# EAGLE board avr-grundschaltung-selber-machen (EAGLE 4.16)
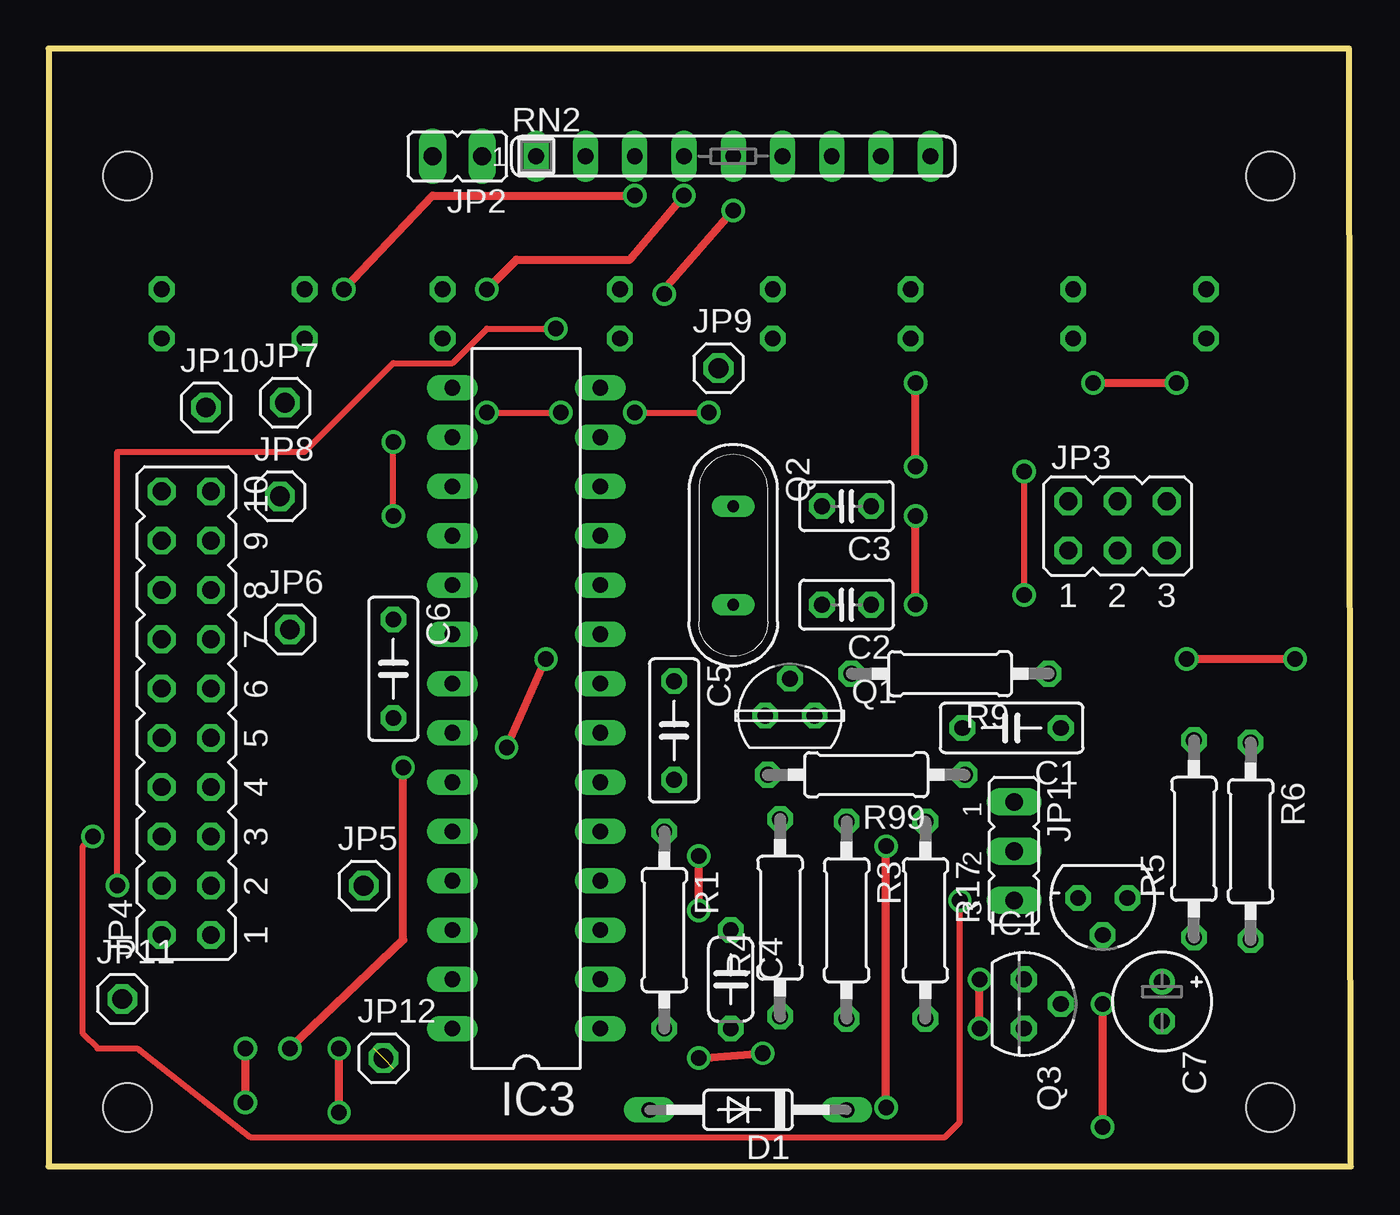
[diagram p0: board, top side]
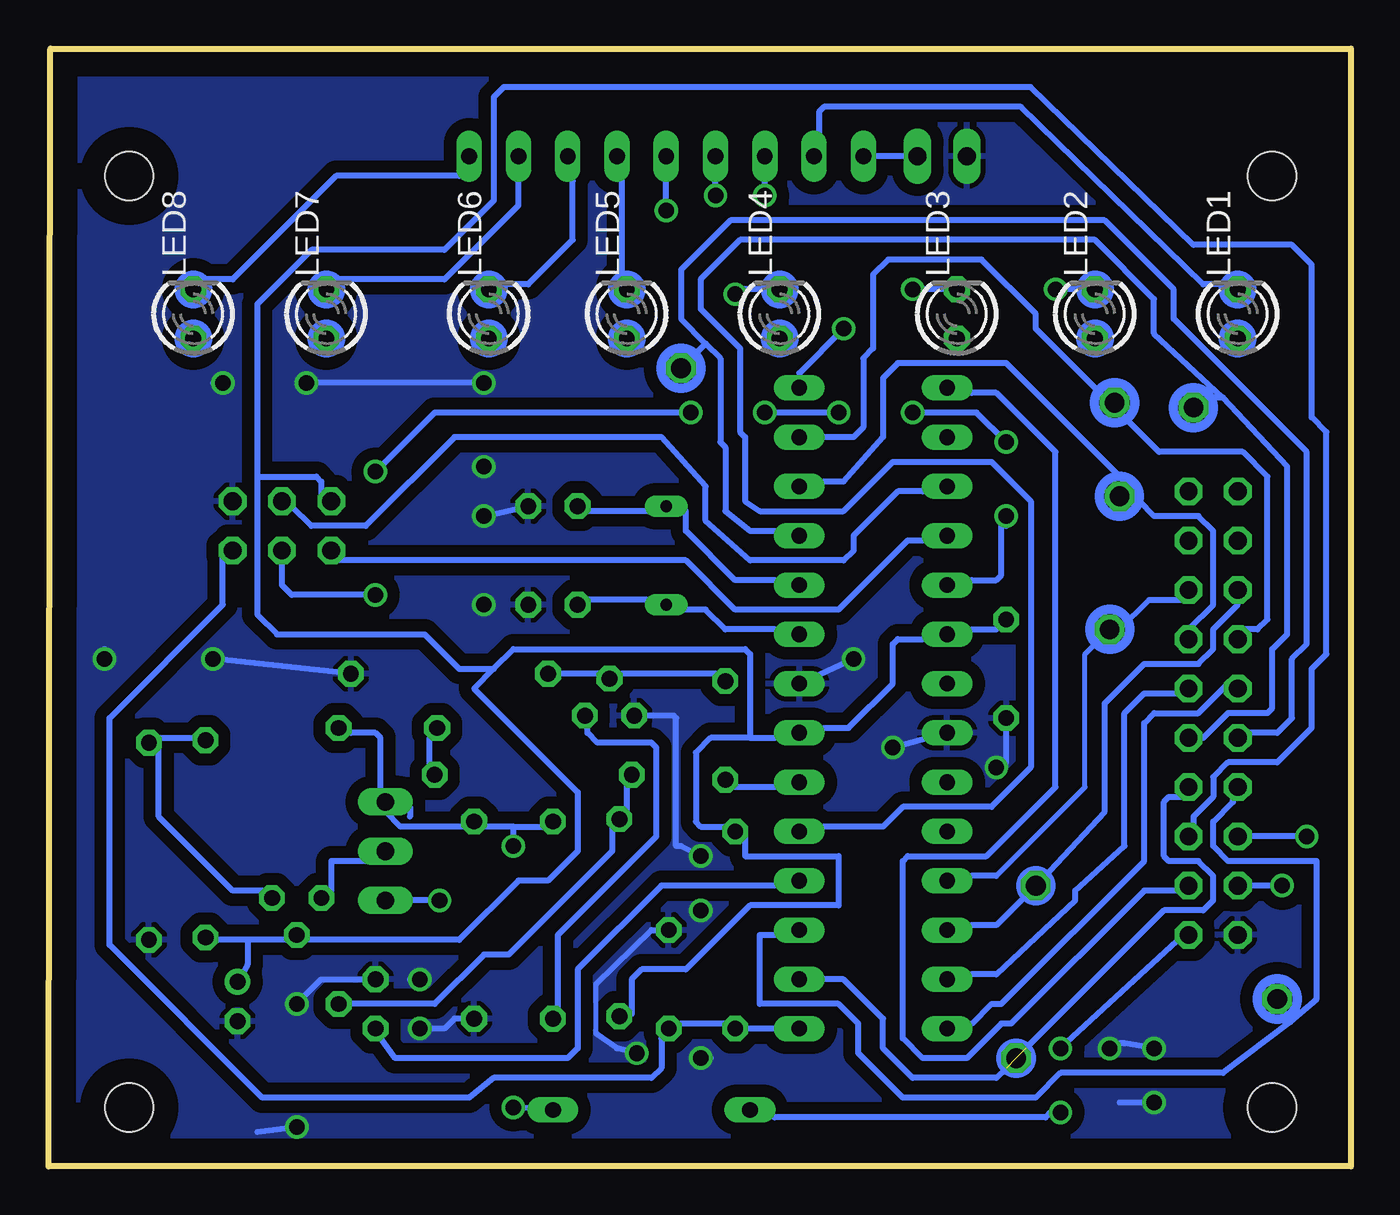
[diagram p1: board, bottom side, seen from below]

Size 67.15 x 57.61 mm. Coordinates in mm from the lower left corner, seen from the top.
Outline: 0,57.61 0,0 67.15,0 67.05,57.61 0,57.61
Copper layers (1*16): Top 0.035mm / dielectric 1.5mm / Bottom 0.035mm
Design rules "default": minimum track width 10mil, minimum drill 24mil, track to track 25mil, track to pad 15mil, pad to pad 8mil, via to via 50mil, smd to smd 8mil, copper to edge 50mil, drill to drill 50mil, minimum pad ring 10mil, minimum via ring 8mil, stop-mask expansion 4mil, vias tented up to drill 0mil, thermal gap 10mil
Holes 2.5 mm at 4.06,3.04 4.06,51.04 62.99,3.04 62.99,51.04

## Footprints (pad centres in the part's own frame; a part is rotated, then mirrored left to right if it is on the bottom)
C050-025X075 = drill 0.813 octagon: 1 -2.54,0; 2 2.54,0
C025-025X050 = drill 0.813 octagon: 1 -1.27,0; 2 1.27,0
C050-024X044 = drill 0.813 octagon: 1 -2.54,0; 2 2.54,0
E2-5 = drill 0.813 pad 1.27 round: + -1.016,0 | drill 0.813 pad 1.27 octagon: - 1.016,0
DO35-10 = drill 0.813 long: A 5.08,0; C -5.08,0
317L = drill 0.813 octagon: 1 -1.27,0; 2 0,1.905; 3 1.27,0
DIL28-3 = drill 0.813 long: 1 -16.51,-3.81; 2 -13.97,-3.81; 3 -11.43,-3.81; 4 -8.89,-3.81; 5 -6.35,-3.81; 6 -3.81,-3.81; 7 -1.27,-3.81; 8 1.27,-3.81; 9 3.81,-3.81; 10 6.35,-3.81; 11 8.89,-3.81; 12 11.43,-3.81; 13 13.97,-3.81; 14 16.51,-3.81; 15 16.51,3.81; 16 13.97,3.81; 17 11.43,3.81; 18 8.89,3.81; 19 6.35,3.81; 20 3.81,3.81; 21 1.27,3.81; 22 -1.27,3.81; 23 -3.81,3.81; 24 -6.35,3.81; 25 -8.89,3.81; 26 -11.43,3.81; 27 -13.97,3.81; 28 -16.51,3.81
JP2 = drill 0.914 long: 1 -2.54,0; 2 0,0; 3 2.54,0
JP1 = drill 0.914 long: 1 0,-1.27; 2 0,1.27
JP3Q = drill 0.914 octagon: 1 -2.54,-1.27; 2 -2.54,1.27; 3 0,-1.27; 4 0,1.27; 5 2.54,-1.27; 6 2.54,1.27
JP10Q = drill 0.914 octagon: 1 -11.43,-1.27; 2 -11.43,1.27; 3 -8.89,-1.27; 4 -8.89,1.27; 5 -6.35,-1.27; 6 -6.35,1.27; 7 -3.81,-1.27; 8 -3.81,1.27; 9 -1.27,-1.27; 10 -1.27,1.27; 11 1.27,-1.27; 12 1.27,1.27; 13 3.81,-1.27; 14 3.81,1.27; 15 6.35,-1.27; 16 6.35,1.27; 17 8.89,-1.27; 18 8.89,1.27; 19 11.43,-1.27; 20 11.43,1.27
1X01 = drill 1.016 octagon: 1 0,0
LED3MM = drill 0.813 octagon: A -1.27,0; K 1.27,0
TO237 = drill 0.813 octagon: 1 1.27,0; 2 0,1.905; 3 -1.27,0
QS = drill 0.61 long: 1 -2.54,0; 2 2.54,0
TO92 = drill 0.813 octagon: 1 1.27,0; 2 0,1.905; 3 -1.27,0
0207/10 = drill 0.813 octagon: 1 -5.08,0; 2 5.08,0
SIL9 = drill 0.813 long: 1 -10.16,0; 2 -7.62,0; 3 -5.08,0; 4 -2.54,0; 5 0,0; 6 2.54,0; 7 5.08,0; 8 7.62,0; 9 10.16,0

## Placement (x,y rotation side)
C1  100n  [C050-025X075]  49.65,22.59 180 top
C2  33p  [C025-025X050]  41.14,28.94 180 top
C3  33p  [C025-025X050]  41.14,34.02 180 top
C4  47n  [C050-024X044]  35.17,9.64 270 top
C5  100n  [C050-025X075]  32.25,22.47 270 top
C6  100n  [C050-025X075]  17.78,25.64 270 top
C7  1u  [E2-5]  57.4,8.5 270 top
D1  1N4148  [DO35-10]  36.06,2.91 180 top
IC1  [317L]  54.35,13.83 180 top
IC3  MEGA8-P  [DIL28-3]  24.63,23.61 90 top
JP1  [JP2]  49.78,16.24 270 top
JP2  [JP1]  21.08,52.06 90 top
JP3  [JP3Q]  55.11,33.01 0 top
JP4  [JP10Q]  7.11,23.36 90 top
JP5  [1X01]  16.25,14.47 0 top
JP6  [1X01]  12.44,27.67 0 top
JP7  [1X01]  12.19,39.36 0 top
JP8  [1X01]  11.93,34.53 0 top
JP9  [1X01]  34.54,41.14 0 top
JP10  [1X01]  8.12,39.1 0 top
JP11  [1X01]  3.81,8.62 0 top
JP12  [1X01]  17.27,5.58 0 top
LED1  [LED3MM]  5.84,43.93 90 bottom
LED2  [LED3MM]  13.2,43.93 90 bottom
LED3  [LED3MM]  20.32,43.93 90 bottom
LED4  [LED3MM]  29.46,43.93 90 bottom
LED5  [LED3MM]  37.33,43.93 90 bottom
LED6  [LED3MM]  44.45,43.93 90 bottom
LED7  [LED3MM]  52.83,43.93 90 bottom
LED8  [LED3MM]  59.68,43.93 90 bottom
Q1  2N7000  [TO237]  38.22,23.23 0 top
Q2  8,000  [QS]  35.3,31.48 270 top
Q3  BC557  [TO92]  50.29,8.37 270 top
R1  10k  [0207/10]  31.75,12.18 270 top
R3  68R  [0207/10]  41.14,12.69 270 top
R4  47k  [0207/10]  37.71,12.81 90 top
R5  330R  [0207/10]  59.05,16.88 90 top
R6  550R  [0207/10]  61.97,16.75 270 top
R9  470k  [0207/10]  46.48,25.39 180 top
R17  100k  [0207/10]  45.21,12.69 270 top
R99  10k  [0207/10]  42.16,20.18 180 top
RN2  470R  [SIL9]  35.3,52.06 0 top

## Library data of the parts
C1-C7 R1 R3-R6 R9 R17 R99 = rcl
D1 = diode
IC1 = v-reg
IC3 = atmel
JP1-JP4 = jumper
JP5-JP12 = pinhead
LED1-LED8 = led
Q1 = transistor-fet
Q2 = special
Q3 = transistor-pnp
RN2 = resistor-sil

## Nets
EIB+: D1.A JP4.1
EIB_IN: IC3.4 Q3.1
EIB_OUT: C5.2 IC3.6
GND [supply]: C2.1 C3.1 C4.1 C6.2 C7.- IC3.8 IC3.22 JP2.2 JP3.6 JP4.2 Q1.3 Q3.3 R6.2 R9.1 R17.2
MISO: IC3.18 JP3.1
MOSI: IC3.17 JP3.4
N$1 [supply]: C1.2 R99.1
N$2: IC1.1 R5.2 R6.1
N$3 [supply]: C1.1 D1.C JP1.1 R3.1 R17.1
N$4: LED8.K RN2.9
N$5 [supply]: Q1.1 R3.2
N$6 [supply]: IC1.3 JP1.2
N$7 [supply]: Q3.2 R4.2 R99.2
N$8: C2.2 IC3.9 Q2.2
N$9: C3.2 IC3.10 Q2.1
N$10: LED7.K RN2.8
N$11: LED6.K RN2.7
N$12: C5.1 Q1.2 R9.2
N$13: LED5.K RN2.6
N$14: LED4.K RN2.5
N$15: LED3.K RN2.4
N$16: LED2.K RN2.3
N$17: LED1.K RN2.2
N$18: JP2.1 RN2.1
OC1A/PWM1: IC3.15 JP4.3
PB0: IC3.14 JP4.4
PC0/ADC0: IC3.23
PC1/ADC1: IC3.24
PC2/ADC2: IC3.25 JP4.15 JP6.1
PC3/ADC3: IC3.26 JP4.16 JP5.1
PC4/ADC4/SDA: IC3.27 JP4.11
PC5/ADC5/SCL: IC3.28 JP4.12
PD0/RXD: IC3.2 JP4.7 JP12.1
PD1/TXD: IC3.3 JP4.8 JP11.1
PD3/INT1: IC3.5 JP4.9 JP10.1
PD5/T1: IC3.11 JP4.10 JP9.1
PD6/AIN0: IC3.12 JP4.13 JP8.1
PD7/AIN1: IC3.13 JP4.14 JP7.1
RESET: C4.2 IC3.1 JP3.5 R1.2
SCK: IC3.19 JP3.3
VCC: C6.1 C7.+ IC1.2 IC3.7 IC3.20 JP3.2 JP4.5 R1.1 R4.1 R5.1
VEXT [supply]: JP1.3 JP4.6

## Tracks (layer width: path | path; a pad name or v marks a point on that pad's centre or on a via)
EIB+  (via drill 0.8)
  Top 0.406: v14.98,2.78 v14.98,6.08
  Bottom 0.305: v14.98,6.08 8.63,11.93 JP4.1 | v14.98,2.78 15.49,2.78 15.74,2.53 29.71,2.53 D1.A
EIB_IN
  Bottom 0.305: IC3.4 29.71,14.47 35.55,14.47 39.87,10.15 39.87,6.08 40.38,5.58 49.27,5.58 50.03,6.59 Q3.1
EIB_OUT
  Bottom 0.305: IC3.6 29.71,19.55 31.75,19.55 C5.2
GND  (via drill 0.8)
  Top 0.406: v58.67,26.15 v64.26,26.15 | v23.62,21.58 v25.65,26.15 | v18.28,20.56 18.28,11.67 v12.44,6.08 | v48,7.1 v48,9.64 | v54.35,2.02 v54.35,8.37 | v44.7,28.94 v44.7,33.52 | v44.7,36.06 v44.7,40.37 | v53.84,40.37 v58.16,40.37 | v10.15,3.29 v10.15,6.08 | v33.52,5.58 v36.82,5.83 | v33.52,13.2 v33.52,15.99
  Bottom 0.254: 38.91,6.85 38.91,9.39
  Bottom 0.305: R9.1 v58.67,26.15 | v64.26,26.15 64.26,26.66 | IC3.22 v23.62,21.58 | v25.65,26.15 IC3.8 | C6.2 17.78,20.82 v18.28,20.56 | R17.2 46.22,7.61 46.73,7.1 v48,7.1 | v48,9.64 48.51,9.64 | Q3.3 53.08,9.64 v54.35,8.37 | v54.35,2.02 56.38,1.77 | v44.7,33.52 C3.1 | v44.7,36.06 44.7,36.31 | v44.7,40.37 v53.84,40.37 | v58.16,40.37 58.67,40.37 | 11.93,6.34 11.68,6.34 v10.15,6.08 | v10.15,3.29 11.93,3.29 | C4.1 36.06,12.18 38.91,9.39 | 38.91,6.85 37.84,6.08 v36.82,5.83 | v33.52,5.58 33.02,5.58 | Q1.3 34.92,23.23 34.79,23.1 34.79,16.5 34.54,16.5 v33.52,15.99 | v33.52,13.2 33.27,12.94
  pour Bottom: 0.25,57.14 66.8,57.14 66.8,0.24 0.25,0.24
MISO
  Bottom 0.305: IC3.18 22.09,32.25 22.86,32.25 26.41,28.69 31.75,28.69 34.28,31.23 52.32,31.23 JP3.1
MOSI
  Bottom 0.305: IC3.17 22.09,34.79 23.36,34.79 25.65,32.5 25.65,31.74 26.16,31.23 30.98,31.23 33.27,33.26 33.27,35.04 35.55,37.58 46.22,37.58 50.79,33.01 53.59,33.01 54.6,34.02 JP3.4
N$1
  Bottom 0.305: R99.1 47.49,20.82 47.49,22.09 C1.2
N$2
  Bottom 0.305: 61.46,22.09 61.46,18.02 57.65,14.21 56.13,14.21 IC1.1 | 61.46,22.09 59.68,22.09 R5.2 | 61.46,22.09 R6.1
N$3  (via drill 0.8)
  Top 0.406: v43.17,3.04 v43.17,16.5
  Bottom 0.305: C1.1 51.56,22.34 50.29,22.34 50.03,22.09 50.03,19.29 JP1.1 | R17.1 44.7,18.02 | 48.51,18.02 48.51,18.53 JP1.1 | R17.1 45.71,18.02 | D1.C v43.17,3.04 | 43.17,17.51 41.65,17.51 R3.1 | v43.17,16.5 43.17,17.51 | 43.17,17.51 44.7,17.51 R17.1 | R17.1 45.71,17.51 49.02,17.51 49.78,18.28 JP1.1
N$4
  Bottom 0.305: RN2.9 45.97,51.04 52.32,51.04 57.65,45.71 59.43,45.71 LED8.K
N$5
  Bottom 0.305: R3.2 40.89,8.12 40.89,11.93 35.81,17.01 35.81,21.58 36.06,21.83 38.86,21.83 39.36,22.34 39.36,22.59 Q1.1
N$6
  Bottom 0.305: IC1.3 52.57,14.21 52.57,15.74 50.79,15.74 JP1.2
N$7
  Bottom 0.305: R99.2 37.33,19.55 37.33,18.28 R4.2 38.09,17.51 38.09,16.24 43.43,10.91 44.7,10.91 47.24,8.37 Q3.2
N$8
  Bottom 0.305: C2.2 39.36,29.2 36.32,29.2 Q2.2 34.28,28.69 33.27,28.69 32.25,27.67 29.71,27.67 IC3.9
N$9
  Bottom 0.305: C3.2 39.36,33.77 36.32,33.77 Q2.1 34.28,33.77 34.28,32.75 31.75,30.21 29.71,30.21 IC3.10
N$10
  Bottom 0.305: RN2.8 42.92,49.52 46.73,45.71 52.57,45.71 LED7.K
N$11
  Bottom 0.305: LED6.K 43.94,45.45 42.41,45.45 40.13,47.74 40.13,50.79 RN2.7
N$12
  Bottom 0.305: C5.1 32.76,25.39 37.59,25.39 Q1.2 38.6,25.39 R9.2
N$13
  Bottom 0.305: LED5.K 37.59,45.71 37.59,50.79 RN2.6
N$14  (via drill 0.8)
  Top 0.406: v35.3,49.26 31.75,45.2 v31.75,44.95
  Bottom 0.305: v35.3,49.26 RN2.5 | 31.49,44.95 v31.75,44.95 31.49,45.2 LED4.K
N$15  (via drill 0.8)
  Top 0.406: v32.76,50.03 29.97,46.72 24.12,46.72 v22.6,45.2
  Bottom 0.305: v32.76,50.03 RN2.4 | LED3.K v22.6,45.2
N$16  (via drill 0.8)
  Top 0.406: v30.22,50.03 19.81,50.03 v15.23,45.2
  Bottom 0.305: v30.22,50.03 RN2.3 | LED2.K v15.23,45.2
N$17
  Bottom 0.305: LED1.K 6.34,45.45 7.62,45.45 17.01,54.6 27.17,54.6 27.43,54.34 27.43,53.33 RN2.2
N$18
  Bottom 0.305: JP2.1 RN2.1
N$19  (via drill 0.5)
  other vias: 4.06,3.04
N$20  (via drill 0.5)
  other vias: 62.99,3.04
N$21  (via drill 0.5)
  other vias: 62.99,51.04
N$22  (via drill 0.5)
  other vias: 4.06,51.04
OC1A/PWM1
  Bottom 0.305: IC3.15 19.55,39.87 18.28,39.87 15.23,36.82 15.23,19.55 18.79,15.99 22.86,15.99 23.11,15.74 23.11,6.59 22.09,5.58 19.81,5.58 18.03,7.35 17.52,7.35 10.66,14.21 8.88,14.21 JP4.3
PB0  (via drill 0.8)
  Top 0.305: v3.55,14.47 3.55,36.82 13.2,36.82 17.78,41.39 20.82,41.39 22.6,43.17 v26.16,43.17
  Top 0.406: v26.16,43.17 26.16,43.42
  Bottom 0.305: IC3.14 28.44,40.88 v26.16,43.17 | v3.55,14.47 JP4.4
PC2/ADC2
  Bottom 0.254: 10.41,29.2 11.93,27.67 JP6.1 13.71,26.4 13.71,19.55 18.28,14.97
  Bottom 0.305: 18.28,14.97 19.55,14.97 IC3.25 | 10.41,29.2 8.63,29.2 JP4.15
PC3/ADC3
  Bottom 0.305: IC3.26 19.55,12.43 18.28,12.43 JP5.1 12.69,18.28 12.69,23.86 10.66,25.9 7.87,25.9 7.11,26.66 7.11,27.67 5.84,28.94 JP4.16
PC4/ADC4/SDA
  Bottom 0.305: IC3.27 19.55,9.89 18.28,9.89 14.22,13.7 14.22,14.21 11.68,16.5 11.68,23.36 10.66,24.37 8.88,24.37 JP4.11
PC5/ADC5/SCL
  Bottom 0.305: IC3.28 19.55,7.35 18.54,8.37 18.03,8.37 10.66,15.74 10.66,22.85 10.15,23.36 7.87,23.36 6.34,24.88 JP4.12
PD0/RXD  (2 unrouted)
  Bottom 0.305: IC3.2 26.16,9.64 24.12,7.61 24.12,6.08 22.6,4.56 18.28,4.56 17.78,5.07 | JP4.7 8.63,19.04 9.39,19.04 9.65,18.78 9.65,15.99 9.39,15.74 7.87,15.74 7.11,14.97 7.11,13.7 7.62,13.2 9.65,13.2 16.76,6.08
PD1/TXD
  Bottom 0.305: 3.12,7.45 1.77,8.62 1.77,15.74 6.34,15.74 7.11,16.5 7.11,17.77 6.09,18.78 JP4.8 | 3.12,7.45 6.6,4.81 14.98,4.81 16.25,3.54 23.11,3.54 25.39,5.83 25.39,7.35 26.41,8.37 30.48,8.37 30.48,11.93 29.71,11.93 IC3.3 | JP11.1 3.3,7.61 3.12,7.45
PD3/INT1
  Bottom 0.305: 6.6,39.61 3.3,36.06 3.3,27.42 4.06,26.66 4.06,23.61 4.31,23.36 6.34,23.36 7.62,22.09 JP4.9 | 6.6,39.61 10.15,42.91 10.15,44.69 13.2,47.74 31.49,47.74 33.52,45.71 33.52,44.18 31.49,42.15 31.49,37.83 31.24,37.58 31.24,34.28 30.48,33.77 26.16,33.77 23.62,36.31 18.54,36.31 16.51,34.28 16.51,20.56 18.54,18.53 23.11,18.53 24.12,17.51 27.17,17.51 IC3.5 | 6.6,39.61 7.36,39.61 JP10.1
PD5/T1
  Bottom 0.305: 33.27,42.41 34.54,43.68 34.54,46.22 32,48.76 12.69,48.76 9.14,45.2 9.14,43.68 2.28,36.82 2.28,26.91 3.04,26.15 3.04,23.1 3.81,22.34 5.58,22.34 JP4.10 | 33.27,42.41 32.51,41.64 32.51,37.33 32.25,37.07 32.25,33.77 30.98,32.75 29.71,32.75 IC3.11 | 33.27,42.41 JP9.1
PD6/AIN0
  Bottom 0.305: 11.42,35.04 10.92,34.28 10.15,33.52 7.87,33.52 7.11,32.75 7.11,28.94 8.38,27.67 JP4.13 | 11.42,35.04 17.78,41.39 23.36,41.39 24.12,40.63 24.12,37.58 26.16,35.29 27.17,35.29 IC3.12 | 11.42,35.04 JP8.1
PD7/AIN1
  Bottom 0.305: 12.44,39.36 9.9,36.82 5.58,36.82 4.31,35.55 4.31,28.18 4.82,27.67 5.58,27.67 JP4.14 | 12.44,39.36 16.25,43.17 16.25,43.93 19.05,46.72 23.87,46.72 24.63,45.96 24.63,42.15 25.14,41.64 25.14,38.09 25.65,37.58 IC3.13 | 12.44,39.36 JP7.1
RESET
  Bottom 0.305: IC3.1 R1.2 32.25,7.35 34.54,7.35 C4.2 35.55,6.59 35.55,5.07 36.06,4.56 44.19,4.56 45.46,3.54 56.13,3.54 64,11.42 64,23.1 58.16,28.94 58.16,31.48 JP3.5
SCK  (via drill 0.8)
  Top 0.305: v50.29,35.8 v50.29,29.45 | v30.22,38.85 v34.03,38.85 | v22.6,38.85 v26.41,38.85 | v17.78,33.52 v17.78,37.33
  Bottom 0.305: JP3.3 55.11,29.96 54.6,29.45 v50.29,29.45 | v50.29,35.8 47.24,38.85 v34.03,38.85 | v26.41,38.85 v30.22,38.85 | v22.6,38.85 19.3,38.85 v17.78,37.33 | 17.78,33.01 v17.78,33.52 18.03,33.26 18.03,30.47 18.28,30.21 19.55,30.21 IC3.19
VCC
  Bottom 0.305: 56.89,11.67 54.86,11.67 IC1.2 53.84,11.67 45.97,11.67 42.92,14.72 41.4,14.72 39.87,16.24 39.87,19.29 45.21,24.63 44.19,25.64 | 56.89,11.67 58.41,11.67 R5.1 | 56.89,11.67 56.89,10.4 C7.+ | C6.1 18.28,27.67 19.55,27.67 IC3.20 22.09,27.17 23.36,27.17 23.62,26.91 23.62,24.88 25.9,22.59 27.17,22.59 IC3.7 29.71,22.09 30.98,22.09 | 30.98,22.09 33.02,22.09 33.78,21.32 33.78,17.77 33.52,17.51 32.25,17.51 R1.1 31.24,17.01 31.24,15.99 26.41,15.99 26.41,13.45 30.98,13.45 34.28,10.15 36.57,10.15 37.08,9.64 37.08,7.86 R4.1 | 30.98,22.09 30.98,26.4 31.24,26.66 43.17,26.66 44.19,25.64 | JP4.5 8.12,17.51 8.12,18.02 7.11,19.04 7.11,20.05 6.34,20.82 3.81,20.82 2.03,22.59 2.03,25.64 1.27,26.4 1.27,37.83 2.03,38.6 2.03,46.47 3.04,47.49 8.12,47.49 16.51,55.61 43.68,55.61 44.19,55.11 44.19,49.77 46.73,47.23 53.59,47.23 56.38,44.44 56.38,35.55 | 56.38,35.55 53.34,35.55 53.08,35.29 53.08,34.53 JP3.2 | 56.38,35.55 56.38,28.44 55.37,27.42 47.75,27.42 45.97,25.64 44.19,25.64
VEXT  (via drill 0.8)
  Top 0.305: v46.98,13.7 46.98,2.27 46.22,1.51 10.41,1.51 4.57,6.08 2.54,6.08 1.77,6.85 1.77,16.5 v2.28,17.01
  Bottom 0.305: v46.98,13.7 JP1.3 | v2.28,17.01 JP4.6
(copper drawn outside any net)
  shapes: Bottom circle x22